# Altium PCB PCB1.PcbDoc
Units mil, origin at the board's own origin, x right, y up, seen from the top; angles counter-clockwise.
Board outline 6000 x 4000 mil, 2 copper layers (Top Layer, Bottom Layer); 58 components, 31 nets, 166 pads, 0 vias.
Unrouted connection lines stored in the file: 104.
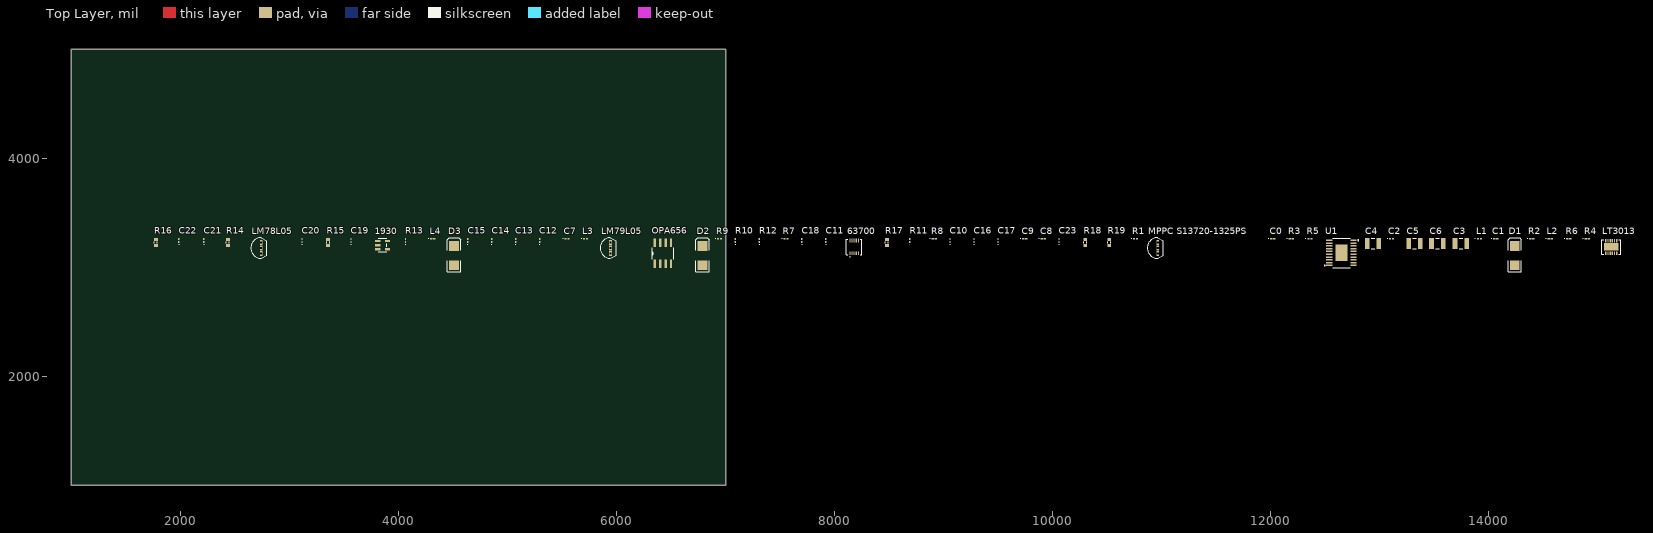
[diagram p0: Top Layer view]
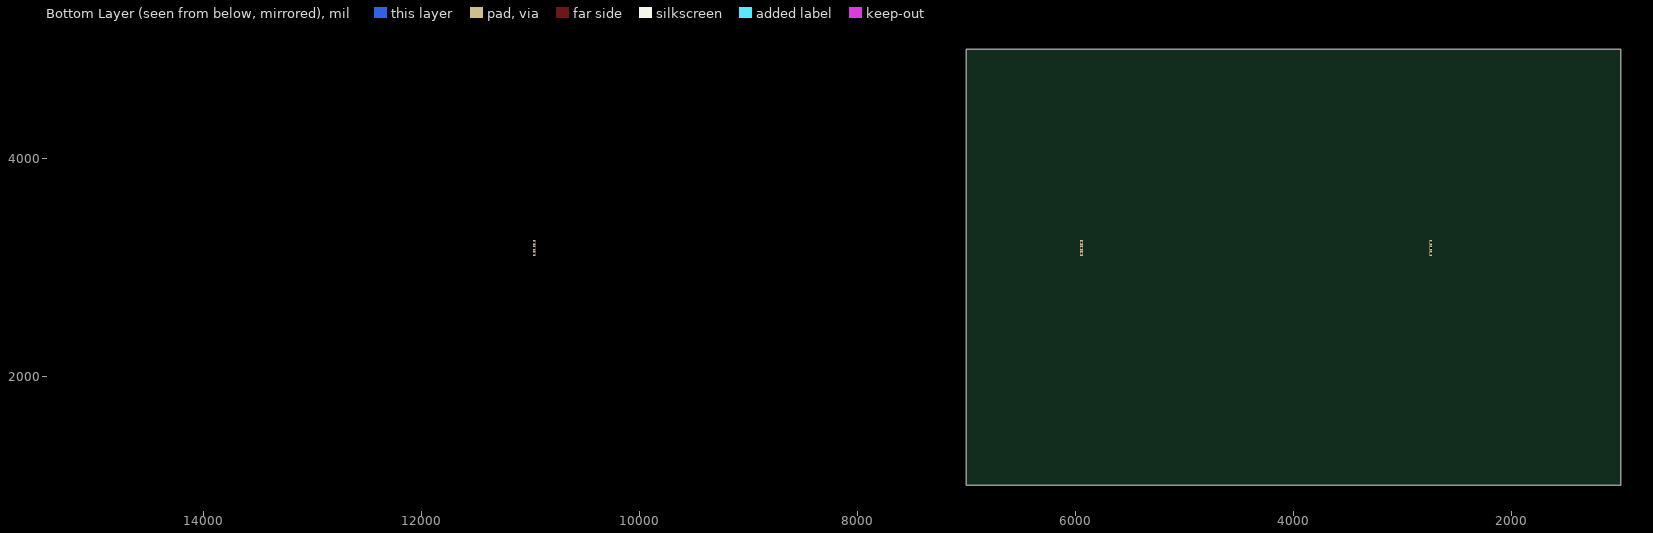
[diagram p1: Bottom Layer view, seen from below]

## Layer stack, top to bottom
Top Solder: solder mask 0.4, Solder Resist, Dk 3.5
Top Layer: signal copper 1.4
Dielectric 1: dielectric 12.6, FR-4, Dk 4.8
Bottom Layer: signal copper 1.4
Bottom Solder: solder mask 0.4, Solder Resist, Dk 3.5

## Board outline
1000,1000 7000,1000 7000,5000 1000,5000

## Design rules (kind name [scope] priority, off if disabled: settings)
Clearance [All] p1: gap=3.94 ignorepadtopadclearanceinfootprint=FALSE
PolygonConnect [All] p1: connectstyle=Relief reliefconductorwidth=10 reliefentries=4 polygonreliefangle="90 Angle" airgapwidth=10
RoomDefinition "YUANLITU (1).~(20).~(1)" [InComponentClass('YUANLITU (1).~(20).~(1)')] p1: confinementstyle=ConfineIn formatcopy=TRUE lockcomponents=FALSE outline 1745,2948.78 15390,2948.78 15390,3383.78 1745,3383.78
RoutingVias [All] p1: holewidth=28 width=50 viastyle="Through Hole" minholewidth=28 minwidth=50 maxholewidth=28 maxwidth=50
SolderMaskExpansion [All] p1: expansion=4
Width [All] p1: maxlimit=10 minlimit=10 preferedwidth=10
30 further rules are at their usual default settings.

## Components (designator, comment, footprint, x,y, rotation, side; value= is the part's Value field where it differs from the comment)
1930 "" SOT-23_S5 3855,3203.78 r0 top
63700 "" DRC10_2P4X1P65 8180,3188.78 r90 top
C0 "" 0603 12020,3263.78 r0 top value=4.7uF
C1 "" 0603 14065,3263.78 r0 top value=2.2uF
C2 "" 0603 13110,3263.78 r0 top value=4.7pF
C3 "" C1210 13745,3218.78 r0 top value=4.7uF
C4 "" C1210 12940,3218.78 r0 top value=4.7uF
C5 "" C1210 13320,3218.78 r0 top value=1uF
C6 "" C1210 13530,3218.78 r0 top value=3.3uF
C7 "" 0603 5545,3263.78 r0 top value=10uF
C8 "" 0603 9915,3263.78 r0 top value=0.1uF
C9 "" 0603 9745,3263.78 r0 top value=0.22uF
C10 "" 0603 9060,3248.78 r90 top value=4.7nF
C11 "" 0603 7920,3248.78 r90 top value=10pF
C12 "" 0603 5295,3248.78 r90 top value=4*4.7uF
C13 "" 0603 5075,3248.78 r90 top value=4*4.7uF
C14 "" 0603 4855,3248.78 r90 top value=4*4.7uF
C15 "" 0603 4635,3248.78 r90 top value=4*4.7uF
C16 "" 0603 9280,3248.78 r90 top value=0.33uF
C17 "" 0603 9500,3248.78 r90 top value=0.1uF
C18 "" 0603 7700,3248.78 r90 top value=0.1uF
C19 "" 0603 3565,3248.78 r90 top value=4.7uF
C20 "" 0603 3115,3248.78 r90 top value=10uF
C21 "" 0603 2215,3248.78 r90 top value=0.33uF
C22 "" 0603 1985,3248.78 r90 top value=0.01uF
C23 "" 0603 10060,3248.78 r90 top value=?
D1 "" SMB 14240,3108.78 r90 top
D2 "" SMB 6790,3108.78 r90 top
D3 "D Schottky" SMB 4510,3108.78 r90 top
L1 "" 0603 13915,3263.78 r0 top value=15uH
L2 "" 0603 14565,3263.78 r0 top value=15uH
L3 "" 0603 5715,3263.78 r0 top value=4.7uH
L4 "" 0603 4315,3263.78 r0 top value=4.7uH
LM78L05 "" PCBComponent_1 2740,3178.78 r90 top
LM79L05 "" PCBComponent_1 5945,3178.78 r90 top
LT3013 "" DFN-12_DE 15125,3188.78 r90 top
"MPPC S13720-1325PS" "" PCBComponent_1 10965,3178.78 r90 top
OPA656 "" D8 6425,3128.78 r90 top
R1 "" 0603 10760,3263.78 r0 top value=169k
R2 "" 0603 14395,3263.78 r0 top value=1M
R3 "" 0603 12190,3263.78 r0 top value=19k
R4 "" 0603 14905,3263.78 r0 top value=1M
R5 "" 0603 12360,3263.78 r0 top value=750K
R6 "" 0603 14735,3263.78 r0 top value=249K
R7 "" 0603 7555,3263.78 r0 top value=10
R8 "" 0603 8915,3263.78 r0 top value=150K
R9 "" 0603 6945,3263.78 r0 top value=619K
R10 "" 0603 7090,3248.78 r90 top value=100K
R11 "adjustable" 0603 8690,3248.78 r90 top value=1k
R12 "" 0603 7310,3248.78 r90 top value=1.5k
R13 "" 0603 4065,3248.78 r90 top value=84.5K
R14 "" J1-0603 2435,3228.78 r90 top value=10K
R15 "" J1-0603 3355,3228.78 r90 top value=1k
R16 "" J1-0603 1775,3228.78 r90 top value=1.5k
R17 "" J1-0603 8480,3228.78 r90 top value=?
R18 "" J1-0603 10300,3228.78 r90 top value=?
R19 "" J1-0603 10520,3228.78 r90 top value=?
U1 "LT8494EFE#PBF" TSSOP-20_FE/CB 12650,3133.78 r0 top value=Value

## Footprints (in the part's own frame and the unit in brackets; to place one, negate y for a bottom-side part, rotate by r counter-clockwise, add the part's x,y. Pads: shape width x height; smd on the part's side, far side on the other; paste and mask are expansions set on the pad)
0603 [mm] "Chip Inductor, Body 0.6x0.3mm, IPC High Density"
  rect 0.5x0.3 smd: 1(-0.35,0) 2(0.35,0)
  silkscreen extent -0.9,-0.05 -0.9,0.05, body extent -0.33,-0.18 0.33,0.18, height 0.55
C1210 [mm] "Chip Capacitor, Body 3.2x2.5mm, IPC High Density"
  rect 1.1x2.6 smd: 1(-1.35,0) 2(1.35,0)
  silkscreen extent -0.4,-1.2 0.4,1.2, body extent -1.7,-1.35 1.7,1.35, height 1.3
D8 [mil]
  rect 78x22 smd: 1(-97,75) 2(-97,25) 3(-97,-25) 4(-97,-75) 5(97,-75) 6(97,-25) 7(97,25) 8(97,75)
  silkscreen extent -54,-98 54,98, body extent -122,-99 122,99, height 69
DFN-12_DE [mil]
  rect 32x12 smd: 1(-57,49.21) 2(-57,29.53) 3(-57,9.84) 4(-57,-9.84) 5(-57,-29.53) 6(-57,-49.21) 7(57,-49.21) 8(57,-29.53) 9(57,-9.84) 10(57,9.84) 11(57,29.53) 12(57,49.21)
  rect 71x134 smd paste-66.5: 13(0,0)
  silkscreen extent -66,-86 66,86, body extent -63,-80 63,80, height 32
DRC10_2P4X1P65 [mm]
  rect 0.85x0.28 smd paste-0.14: 1(-1.475,1) 2(-1.475,0.5) 3(-1.475,0) 4(-1.475,-0.5) 5(-1.475,-1) 6(1.475,-1) 7(1.475,-0.5) 8(1.475,0) 9(1.475,0.5) 10(1.475,1)
  silkscreen extent -2.33,-1.8 1.8,1.8, body extent -1.6,-1.55 1.6,1.55, height 1
J1-0603 [mm] "Chip Resistor, Body 1.6x0.8mm, IPC High Density"
  rect 0.7x0.9 smd: 1(-0.75,0) 2(0.75,0)
  silkscreen extent -0.2,-0.35 0.2,0.35, body extent -0.85,-0.48 0.85,0.48, height 0.9
PCBComponent_1 [mm]
  rect 1.22x0.62 hole 0.39 square: 2(0,0) 3(-1.27,0) 4(1.27,0)
  silkscreen extent -2.41,-1.33 2.41,2.41
SMB [mm] "DO-214-AA/SMB; 2 C-Bend Leads; Body 5.3 x 3.6 mm, inc. leads (LxW)"
  rect 2.3x2.3 smd: 1(-2.25,0) 2(2.25,0)
  silkscreen extent -3.8,-1.55 4.1,1.55
SOT-23_S5 [mil]
  rect 48x20 smd mask+0: 1(-45,37.4) 2(-45,0) 3(-45,-37.4) 4(45,-37.4) 6(45,37.4)
  silkscreen extent -40,-62 40,62, body extent 0,0 10,10, height 10
TSSOP-20_FE/CB [mil]
  rect 58x14 smd: 1(-111,115.2) 2(-111,89.6) 3(-111,64) 4(-111,38.4) 5(-111,12.8) 6(-111,-12.8) 7(-111,-38.4) 8(-111,-64) 9(-111,-89.6) 10(-111,-115.2) 11(111,-115.2) 12(111,-89.6) 13(111,-64) 14(111,-38.4) 15(111,-12.8) 16(111,12.8) 17(111,38.4) 18(111,64) 19(111,89.6) 20(111,115.2)
  rect 108x152 smd paste-75.5: EPAD(0,0)
  silkscreen extent -160,-135 160,135, body extent 0,0 10,10, height 10

## Part data
1930: library part 1930
63700: library part 63700
C0 C1 C2 C3 C4 C5 C6 C7 C8 C9 C10 C11 C12 C13 C14 C15 C16 C17 C18 C19 C20 C21 C22 C23: library part Cap, "Capacitor", LatestRevisionDate=17-Jul-2002, LatestRevisionNote="Re-released for DXP Platform.", PackageDescription="Radial Cap, Thru-Hole; 2 Leads; 0.3 in Pin Spacing", PackageReference=RAD-0.3, Published=8-Jun-2000, Publisher="Altium Limited"
D1 D2: library part "D Schottky", "Schottky Diode", Code_JEDEC=DO-214-AA, LatestRevisionDate=17-Jul-2002, LatestRevisionNote="Re-released for DXP Platform.", PackageDescription="DO-214-AA/SMB; 2 C-Bend Leads; Body 5.3 x 3.6 mm, inc. leads (LxW)", PackageReference=SMB, Published=8-Jun-2000, Publisher="Altium Limited"
D3: "Schottky Diode", Code_JEDEC=DO-214-AA, LatestRevisionDate=17-Jul-2002, LatestRevisionNote="Re-released for DXP Platform.", PackageDescription="DO-214-AA/SMB; 2 C-Bend Leads; Body 5.3 x 3.6 mm, inc. leads (LxW)", PackageReference=SMB, Published=8-Jun-2000, Publisher="Altium Limited"
L1 L2 L3 L4: library part Inductor, "Inductor", Code_IEC=1005, Code_JEITA=0402, LatestRevisionDate=29-May-2009, LatestRevisionNote="IPC-7351 Footprint Added.", PackageDescription="Chip Inductor", PackageReference=0402-A, Published=8-Jun-2000, Publisher="Altium Limited"
LM78L05 LM79L05: library part LM79L05
LT3013: library part 3013
"MPPC S13720-1325PS": library part "MPPC S13720-1325PS"
OPA656: library part OPA656
R1 R2 R3 R4 R5 R6 R7 R8 R9 R10 R11 R12 R13 R14 R15 R16 R17 R18 R19: library part Res3, "Resistor", LatestRevisionDate=29-May-2009, LatestRevisionNote="IPC-7351 Footprint Added.", PackageDescription="Chip Resistor", PackageReference=J1-0603, Published=8-Jun-2000, Publisher="Altium Limited"
U1: "Imported", Manufacturer_Part_Number=lt8494efe#pbf, RefDes=RefDes, Type=Type, Vendor="Linear Technology"

## Nets (pads, with @x,y where several pads share a name; then routed paths per layer and width w, separated by ;. In a path a pad name is that pad's centre, name@x,y a point inside that pad or via, vN(x,y) a via of type N, cw(c..) or ccw(c..) an arc to the next point about the centre after c; other vN are vias at no path point)
+5V: 1930.4 63700.5 C7.2 C19.2 L4.1 R7.2
Net1: C2.2 C3.1 C5.2 D1.2 LT3013.10 R2.2 R4.1 U1.1
Net2: "MPPC S13720-1325PS.3" C6.1 R5.2 R6.1
Net3: C18.1 LM79L05.3 OPA656.4 R12.1
Net4: 1930.2 63700.2 63700.7 C0.1 C4.2 C5.1 C6.2 C7.1 C8.1 C9.2 C10.2 C15.1 C16.1 C17.1 C18.2 C19.1 C20.1 C20.2 C21.1 C21.2 C22.1 D3.2 L2.2 L3.2 LM78L05.2 LT3013.5 OPA656.3 R1.1 R3.2 R6.2 R11.2 R13.2 R14.1 R16.1 R19.2
Net5: C22.2 LM78L05.3 OPA656.7 R15.2
Net1930_1: 1930.1 D3.1 L4.2
Net1930_3: 1930.3 R13.1 R14.2
Net63700_1: 63700.1 C10.1
Net63700_3: 63700.3 63700.4 C8.2 R7.1
Net63700_6: 63700.6 D2.2 L3.1
Net63700_8: 63700.8 C12.2 C16.2 D2.1 LM79L05.2 R9.1 R10.1
Net63700_9: 63700.9 C11.1 R8.1 R9.2
Net63700_10: 63700.10 C9.1 R8.2
NetC1_1: C1.1 D1.1 L2.1
NetC1_2: C1.2 L1.2 U1.20
NetC2_1: C2.1 R2.1 R3.1 U1.3
NetC3_2: C3.2 C4.1
NetC11_2: C11.2 R10.2
NetC12_1: C12.1 C13.2
NetC13_1: C13.1 C14.2
NetC14_1: C14.1 C15.2
NetC17_2: C17.2 R11.1 R12.2
NetC23_1: C23.1 OPA656.2 R17.1 R18.1
NetC23_2: C23.2 OPA656.6 R17.2
NetLM78L05_1: R15.1 R16.2
NetLT3013_3: LT3013.3 R5.1
NetLT3013_6: LT3013.6 R4.2
"NetMPPC S13720-1325PS_2": "MPPC S13720-1325PS.2" R18.2 R19.1
NetR1_2: R1.2 U1.10
VCC: C0.2 L1.1 U1.12 U1.18
pads on no net: 1930.6 "MPPC S13720-1325PS.4" LM78L05.4 LM79L05.4 LT3013.1 LT3013.2 LT3013.4 LT3013.7 LT3013.8 LT3013.9 LT3013.11 LT3013.12 LT3013.13 OPA656.1 OPA656.5 OPA656.8 U1.2 U1.4 U1.5 U1.6 U1.7 U1.8 U1.9 U1.11 U1.13 U1.14 U1.15 U1.16 U1.17 U1.19 U1.EPAD